# EAGLE board 85 SOP8 v2 (EAGLE 9.3.1)
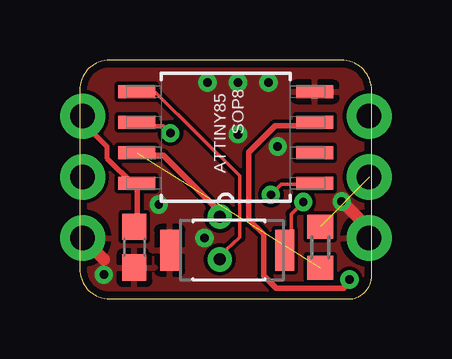
[diagram p0: board, top side]
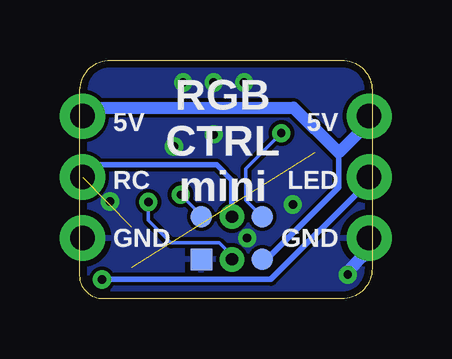
[diagram p1: board, bottom side, seen from below]

Size 12.17 x 9.96 mm. Coordinates in mm from the lower left corner, seen from the top.
Outline: 12.17,0.97 12.17,8.69 arc90 10.9,9.96 1.27,9.96 arc90 0,8.69 0,1.27 arc90 1.27,0 11.21,0 arc90 12.17,0.97
Copper layers (1*16): Top 0.035mm / dielectric 1.5mm / Bottom 0.035mm
Design rules "default *": minimum track width 6mil, minimum drill 0.35mm, track to track 6mil, track to pad 6mil, pad to pad 6mil, via to via 6mil, smd to smd 6mil, copper to edge 0.3mm, drill to drill 6mil, minimum pad ring 10mil, minimum via ring 8mil, stop-mask expansion 4mil, vias tented up to drill 1mm, thermal gap 10mil

## Footprints (pad centres in the part's own frame; a part is rotated, then mirrored left to right if it is on the bottom)
C0603 = smd 1.1 x 1: 1 -0.85,0; 2 0.85,0
1X03_NO_SILK = drill 1.016 pad 1.88: 1 0,0; 2 2.54,0; 3 5.08,0
R0603 = smd 1 x 1.1: 1 -0.85,0; 2 0.85,0
SW_B3U-1000P = smd 0.8 x 1.7: 1 -2.335,0; 2 2.462,0
SOIC127P798X216-8N = smd 1.549 x 0.533: 1 -3.708,1.905; 2 -3.708,0.635; 3 -3.708,-0.635; 4 -3.708,-1.905; 5 3.708,-1.905; 6 3.708,-0.635; 7 3.708,0.635; 8 3.708,1.905
ISCP_PADS_2ROW2HNEW = smd 0.889 x 0.889: 5V -1.27,1.778; GND 1.27,1.778; MISO -1.27,0; MOSI 0,1.778; RST 1.27,0; SCK 0,0 | drill 0.508 pad 0.889: MO 0,1.778; SC 0,0

## Placement (x,y rotation side)
C3  [C0603]  2.29,2.16 270 top
J1  [1X03_NO_SILK]  0.13,2.54 90 top
J2  [1X03_NO_SILK]  12.07,2.54 90 top
R1  [R0603]  10.03,2.16 90 top
S1  B3U-1000P  [SW_B3U-1000P]  6.22,2.03 180 top
U2  ATTINY85-15ST  [SOIC127P798X216-8N]  6.1,6.73 180 top
U$1  ISCP_PORTPOGONEW  [ISCP_PADS_2ROW2HNEW]  5.84,3.43 180 bottom

## Library data of the parts
C3 R1 = resistor
J1 J2 = SparkFun-Connectors
S1 = B3U-1000P; AVAILABILITY: Unavailable; DESCRIPTION: Switch Tactile N.O. SPST Round Button Gull Wing 0.05A 12VDC 1.5N SMD Embossed T/R; MF: Omron; MP: B3U-1000P; PACKAGE: None; PRICE: None
U2 = ATTINY85-15ST; AVAILABILITY: Unavailable; DESCRIPTION: MCU 8-bit ATtiny AVR RISC 8KB Flash 3.3V/5V 8-Pin SOIC; MF: Microchip; MP: ATTINY85-15ST; PACKAGE: SOIC-8 Microchip; PRICE: None
U$1 = CoreDuino

## Nets
5V: C3.1 J1.3 J2.3 U2.8 U$1.5V
GND: C3.2 J1.1 J2.1 S1.2 U2.4 U$1.GND
LED: J1.2 U2.3
MI: U2.6 U$1.MISO
MO: S1.1 U2.5 U$1.MO U$1.MOSI
N$1: R1.1 U2.7
PB3: U2.2
RST: U2.1 U$1.RST
SCK: J2.2 R1.2 U$1.SC U$1.SCK

## Tracks (layer width: path | path; a pad name or v marks a point on that pad's centre or on a via)
5V
  Top 0.152: 2.41,2.95 C3.1 | 2.41,4.75 U2.8 2.3,4.77 2.24,4.77 | J1.3 0.13,7.37
  Top 0.203: 2.24,4.77 1.14,5.87 1.14,6.35 0.13,7.37
  Top 0.229: 2.41,4.75 2.41,2.95
  Bottom 0.152: J1.3 0.13,7.37 | 4.26,1.65 4.28,1.77
  Bottom 0.229: 4.28,1.77 1.4,4.65 1.4,6.1 | 4.26,1.65 U$1.5V
  Bottom 0.508: 0.13,7.37 1.4,6.1 3.28,7.98 11.84,7.98 J2.3
GND  (via drill 0.35)
  Top 0.152: 1.02,1.65 v1.02,1.02 | 11.8,3.19 11.8,2.54
  Top 0.305: v10.92,4.06 11.18,3.81
  Top 0.508: J1.1 1.02,1.65 | v10.92,4.06 11.8,3.19
  Bottom 0.305: 0.38,1.78 0.38,2.54
  Bottom 0.508: v1.02,1.02 1.02,1.14 0.38,1.78
  other vias: 6.6,6.86 6.6,9.02 5.33,9.02 7.87,9.02 5.21,2.54 3.3,3.94 8.26,6.35
  pour Top: 0,10.67 11.81,10.67 11.81,-0.76 0,-0.76
  pour Bottom: 0.13,10.67 0.13,-0.76 12.83,-0.76 12.83,10.67
LED  (via drill 0.35)
  Top 0.152: 9.35,7.21 U2.3 | v11.25,0.81 11.25,0.69
  Top 0.229: 9.35,7.21 8.15,7.21 7.06,6.12 7.06,3.3 7.68,2.69 7.68,0.96 8.19,0.44 11.01,0.44 11.25,0.69
  Bottom 0.152: J1.2 0.13,4.9
  Bottom 0.229: 0.13,4.9 4.22,0.81 v11.25,0.81
MI  (via drill 0.35)
  Top 0.152: v3.79,6.91 3.48,7.21 2.54,7.21 U2.6
  Bottom 0.152: v3.79,6.91 5.26,5.44 5.26,4.11 U$1.MISO
MO  (via drill 0.35)
  Top 0.152: U$1.MO 5.84,1.8 6.68,2.57 6.68,5.13 3.18,8.58 2.41,8.58 U2.5 | v9.32,4.04 8.81,3.53 8.81,2.03 S1.1
  Bottom 0.152: v9.32,4.04 9.32,3.28 8.38,2.34 6.38,2.34 5.77,1.73 U$1.MO
N$1  (1 unrouted)
RST  (via drill 0.35)
  Top 0.152: v7.98,4.34 8.41,4.77 9.75,4.77 U2.1
  Bottom 0.152: v7.98,4.34 7.11,3.48 U$1.RST
SCK  (1 unrouted)
  Top 0.229: U$1.SCK 5.84,3.63 3.48,5.99 2.49,5.99
  Bottom 0.152: 5.84,3.45 U$1.SCK
  Bottom 0.229: U$1.SCK 5.84,4.95 6.48,5.59 11.56,5.59 J2.2

## Text on the board
tNames: ATTINY85 / SOP8
bNames: 5V | 5V | RGB / CTRL / mini | LED | RC | GND | GND